# Altium PCB golden_arduino.PcbDoc
Units mil, origin at the board's own origin, x right, y up, seen from the top; angles counter-clockwise.
Board outline 3256 x 3059 mil, 2 copper layers (Top Layer, Bottom Layer); 59 components, 54 nets, 247 pads, 46 vias.
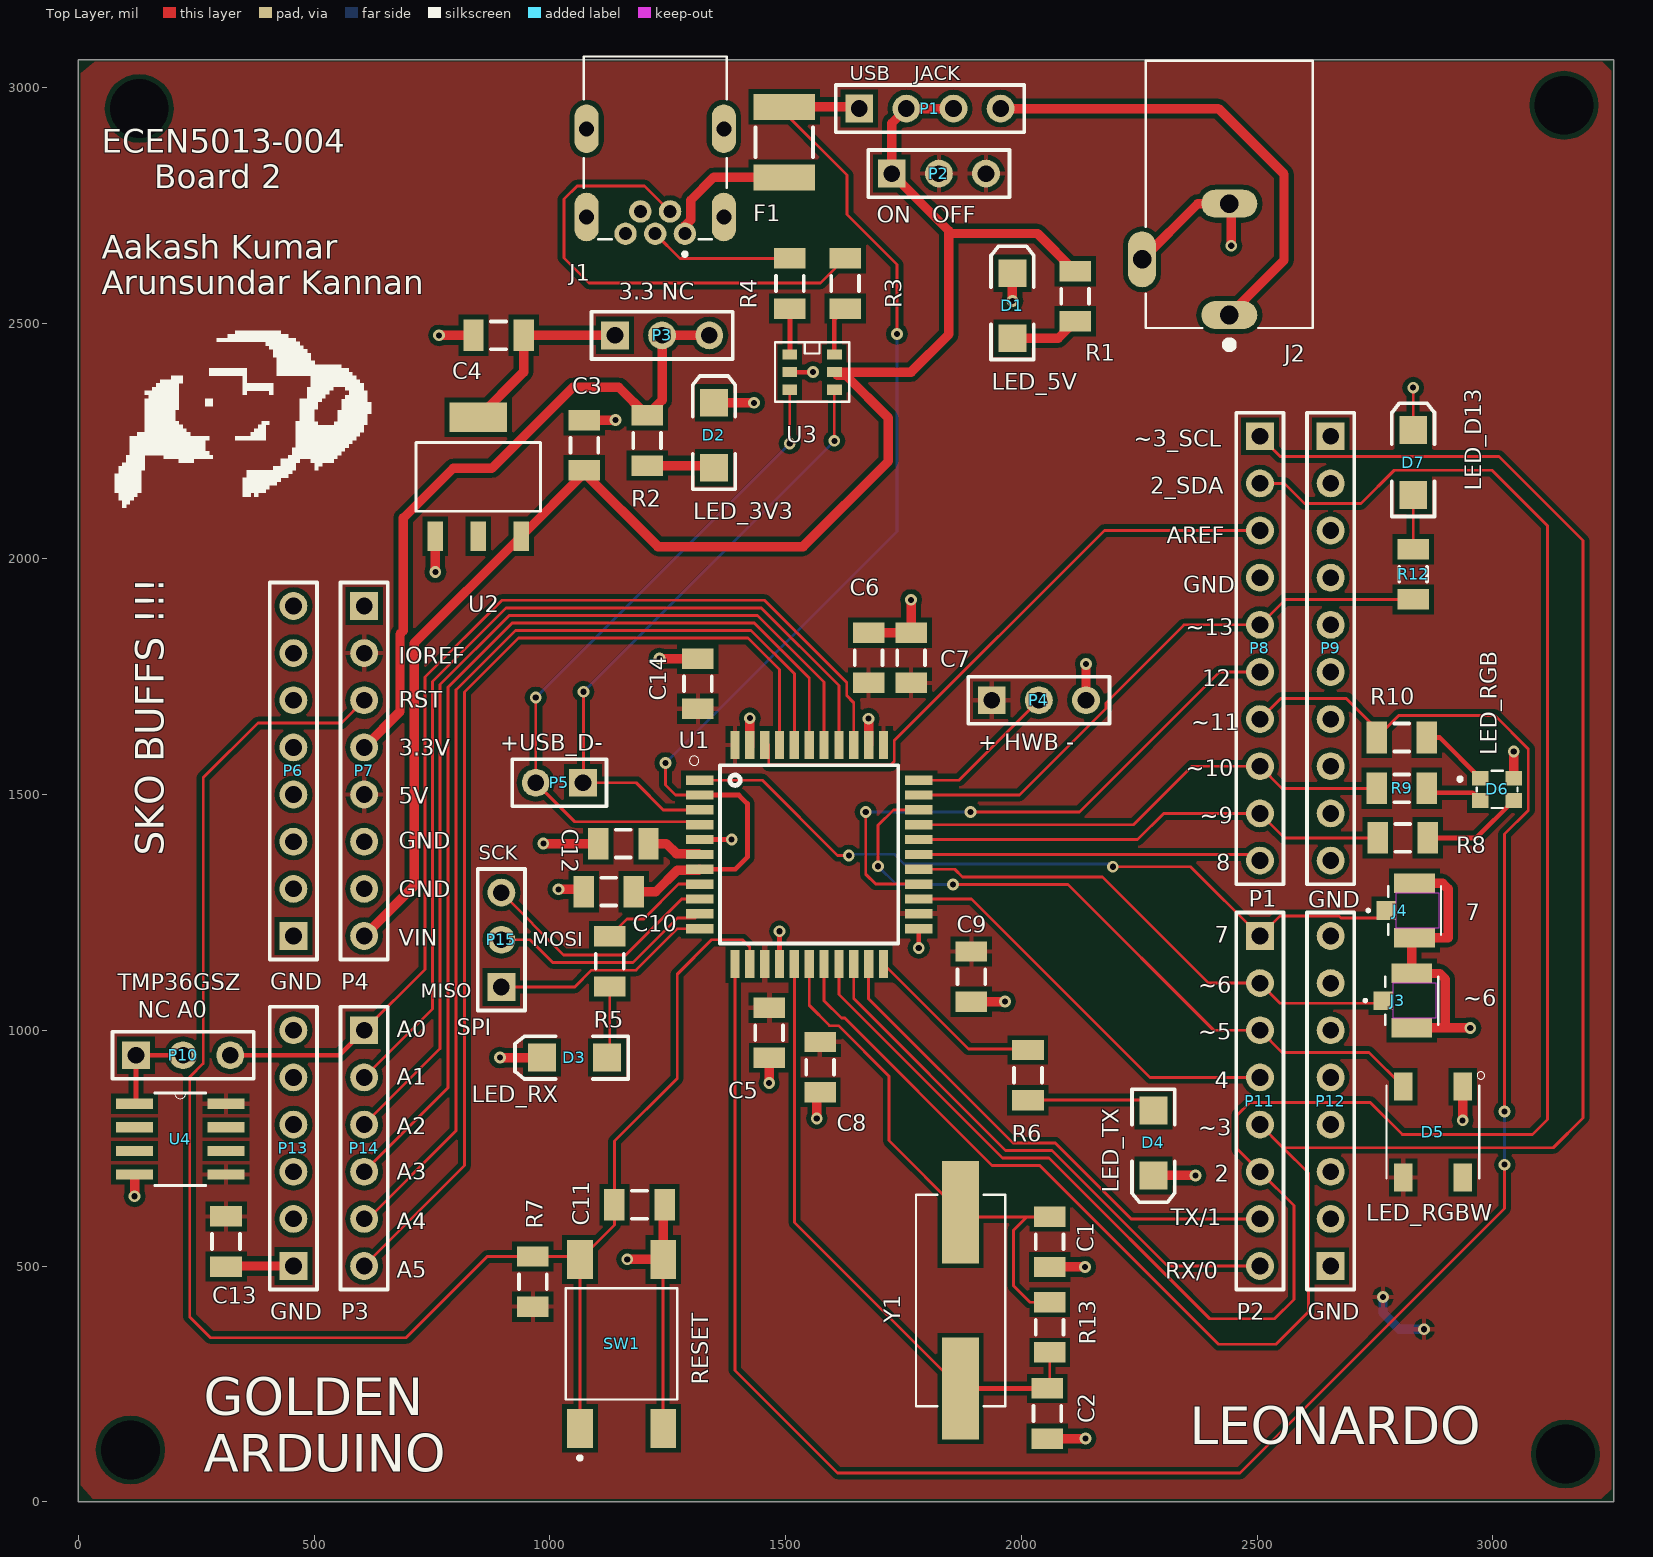
[diagram p0: Top Layer view]
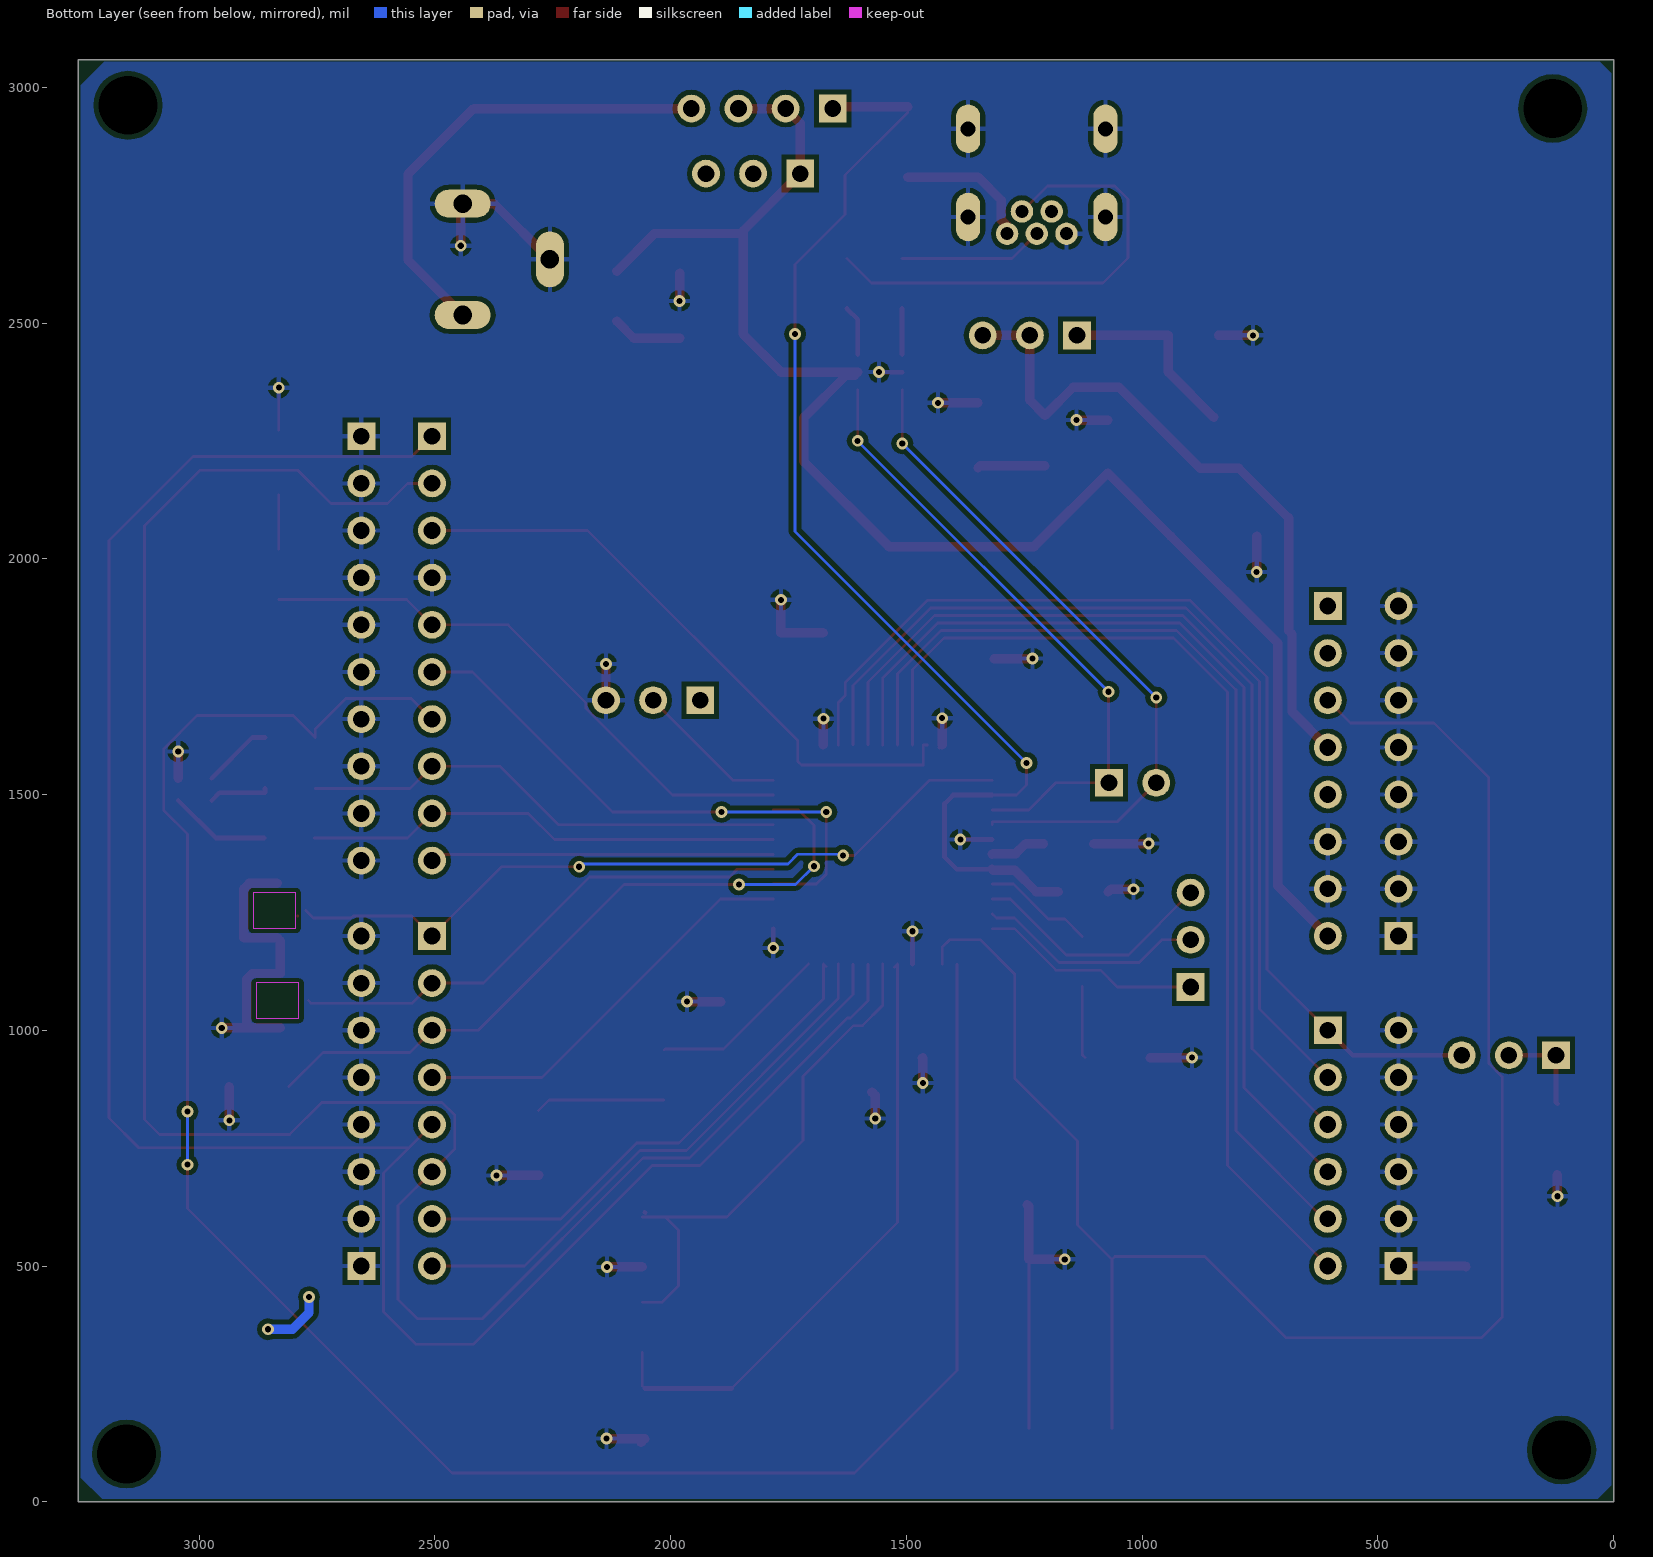
[diagram p1: Bottom Layer view, seen from below]

## Layer stack, top to bottom
Top Solder: solder mask 0.4, Solder Resist, Dk 3.5
Top Layer: signal copper 1.4
Dielectric 1: dielectric 12.6, FR-4, Dk 4.8
Bottom Layer: signal copper 1.4
Bottom Solder: solder mask 0.4, Solder Resist, Dk 3.5

## Board outline
0,0 3256,0 3256,3059 0,3059

## Design rules (kind name [scope] priority, off if disabled: settings)
Clearance [All] p1: gap=10 ignorepadtopadclearanceinfootprint=TRUE except(0: Arc-Hole Track-Hole SMDPad-Hole THPad-Hole Via-Hole Fill-Hole Poly-Hole Region-Hole Text-Hole)
PolygonConnect [All] p1: connectstyle=Relief reliefconductorwidth=10 reliefentries=4 polygonreliefangle="90 Angle" airgapwidth=10
RoutingVias [All] p1: holewidth=13 width=25 viastyle="Through Hole" minholewidth=13 minwidth=25 maxholewidth=13 maxwidth=25
SolderMaskExpansion [All] p1: expansion=4
Width [All] p1: maxlimit=20 minlimit=6 preferedwidth=10
30 further rules are at their usual default settings.

## Components (designator, comment, footprint, x,y, rotation, side; value= is the part's Value field where it differs from the comment)
C1 "Cap Semi" C1206 2060,551.15 r90 top value=22pF
C2 "Cap Semi" C1206 2055,187.15 r90 top value=22pF
C3 "Cap Semi" C1206 1073,2241 r270 top value=22uF
C4 "Cap Semi" C1206 891,2474 r0 top value=22uF
C5 "Cap Semi" C1206 1465,994.85 r90 top value=22uF
C6 "Cap Semi" C1206 1676,1790 r270 top value=22uF
C7 "Cap Semi" C1206 1766,1790 r270 top value=22uF
C8 "Cap Semi" C1206 1573,922 r90 top value=22uF
C9 "Cap Semi" C1206 1894,1114 r90 top value=22uF
C10 "Cap Semi" C1206 1125,1294 r0 top value=22uF
C11 "Cap Semi" C1206 1190,630 r180 top value=22uF
C12 "Cap Semi" C1206 1156,1396 r0 top value=1uF
C13 "Cap Semi" C1206 313,552 r90 top value=22uF
C14 "Cap Semi" C1206 1314,1735.15 r270 top value=22uF
D1 "LED_5V" 3.2X1.6X1.1 1981,2536.9 r90 top
D2 "LED_3V3" 3.2X1.6X1.1 1348,2262 r90 top
D3 "LED_RX" 3.2X1.6X1.1 1052,942 r180 top
D4 "LED_TX" 3.2X1.6X1.1 2280,761 r270 top
D5 "LED_RGBW" *LED_IN-PI554FCH 2873,784 r270 top
D6 "LED_RGB" *LED_ASMB-KTF0-0A306 3009,1511 r0 top
D7 "LED_D13" 3.2X1.6X1.1 2831,2204 r90 top
F1 "Fuse Thermal" 1812 1497,2884 r90 top
J1 "XM7D-0512" *OMRON_XM7D-0512_XM7D-0512(Primary) 1223.33,2724.99 r0 top
J2 "PJ-102A" *CUI_PJ-102A 2441,2773 r90 top
J3 "~6" *TE_HRS_U.FL-R-SMT(10) 2828,1063 r0 top
J4 "7" *TE_HRS_U.FL-R-SMT(10) 2834,1254.07 r0 top
P1 "USB    JACK" HDR1X4 1656,2955 r0 top
P2 "ON   OFF" HDR1X3 1725,2817 r0 top
P3 "3.3 NC" HDR1X3 1138,2474 r0 top
P4 "+ HWB -" HDR1X3 1937,1700 r0 top
P5 "+USB_D-" HDR1X2 1070,1525 r180 top
P6 "GND" HDR1X8 456,1200 r90 top
P7 "P4" HDR1X8 606,1900 r270 top
P8 "P1" HDR1X10 2506,2260 r270 top
P9 "GND" HDR1X10 2656,2260 r270 top
P10 "NC A0" HDR1X3 122,947 r0 top
P11 "P2" HDR1X8 2506,1200 r270 top
P12 "GND" HDR1X8 2656,500 r90 top
P13 "GND" HDR1X6 456,500 r90 top
P14 "P3" HDR1X6 606,1000 r270 top
P15 "SPI" HDR1X3 897,1092 r90 top
R1 "Res3" C1206 2114,2557 r90 top value=1K
R2 "Res3" C1206 1206,2251 r90 top value=1K
R3 "Res3" C1206 1626,2584 r90 top value=22
R4 "Res3" C1206 1509,2584 r90 top value=22
R5 "Res3" C1206 1127,1146 r90 top value=1K
R6 "Res3" C1206 2014,905 r90 top value=1K
R7 "Res3" C1206 964,467 r270 top value=1k
R8 "Res3" C1206 2809,1408 r180 top value=300
R9 "Res3" C1206 2807,1513 r180 top value=300
R10 "Res3" C1206 2807,1621 r180 top value=300
R12 "Res3" C1206 2831,1967 r270 top value=300
R13 "Res3" C1206 2060,369.85 r270 top value=1M
SW1 "RESET" *TE_FSM4JSMA 1152,335 r90 top
U1 "ATMEGA32U4RC-AU" *QFP80P1200X1200X120-44N 1550,1373 r0 top
U2 "AZ1117CH-3.3TRG1" *SOT230P696X180-4N 848,2174 r90 top
U3 "IP4234CZ6,125" *SOT-457 1556,2396 r0 top
U4 "TMP36GSZ" *SOIC127P600X175-8N 216,769 r0 top
Y1 "ECS-35-17-5PX-TR" *XTAL_ECS-35-17-5PX-TR 1871,427 r90 top

## Footprints (in the part's own frame and the unit in brackets; to place one, negate y for a bottom-side part, rotate by r counter-clockwise, add the part's x,y. Pads: shape width x height; smd on the part's side, far side on the other; paste and mask are expansions set on the pad)
3.2X1.6X1.1 [mm] "SMT LED; 2 Flat Leads"
  rect 1.5x1.5 smd: 1(-1.75,0) 2(1.75,0)
  silkscreen extent -2.9,-1.15 3.2,1.15
1812 [mm] "Chip Capacitor, Body 4.5x3.2mm, IPC High Density"
  rect 1.4x3.3 smd: 1(-1.9,0) 2(1.9,0)
  silkscreen extent -0.8,-1.55 0.8,1.55, body extent -2.4,-1.7 2.4,1.7, height 1.4
*CUI_PJ-102A [mm]
  oval 1.508x3.016 hole 1: 1(-6.5,0) 2(-0.5,0)
  oval 3.016x1.508 hole 1: 3(-3.5,4.7)
  silkscreen extent -8.3,-4.5 7.2,4.5
*LED_ASMB-KTF0-0A306 [mm]
  rect 0.9x0.8 smd: 1(0.9,-0.6) 2(-0.9,-0.6) 3(-0.9,0.6) 4(0.9,0.6)
  silkscreen extent -2.1,-1 1.1,1
*LED_IN-PI554FCH [mm]
  rect 1.5x1 smd: 1(-2.45,1.6) 2(-2.45,-1.6) 3(2.45,-1.6) 4(2.45,1.6)
  silkscreen extent -3.25,-2.5 2.5,2.78
*OMRON_XM7D-0512_XM7D-0512(Primary) [mm]
  round 1.208 hole 0.7: 1(1.6,-0.9) 2(0.8,0.3) 3(0,-0.9) 4(-0.8,0.3) 5(-1.6,-0.9)
  oval 1.308x2.616 hole 0.8: SH1(-3.7,4.75) SH2(-3.7,0) SH3(3.7,0) SH4(3.7,4.75)
  silkscreen extent -3.85,-2.1 3.85,8.65
*QFP80P1200X1200X120-44N [mm]
  rect 1.5x0.5 smd: 1(-5.9,4) 2(-5.9,3.2) 3(-5.9,2.4) 4(-5.9,1.6) 5(-5.9,0.8) 6(-5.9,0) 7(-5.9,-0.8) 8(-5.9,-1.6) 9(-5.9,-2.4) 10(-5.9,-3.2) 11(-5.9,-4) 23(5.9,-4) 24(5.9,-3.2) 25(5.9,-2.4) 26(5.9,-1.6) 27(5.9,-0.8) 28(5.9,0) 29(5.9,0.8) 30(5.9,1.6) 31(5.9,2.4) 32(5.9,3.2) 33(5.9,4)
  rect 0.5x1.5 smd: 12(-4,-5.9) 13(-3.2,-5.9) 14(-2.4,-5.9) 15(-1.6,-5.9) 16(-0.8,-5.9) 17(0,-5.9) 18(0.8,-5.9) 19(1.6,-5.9) 20(2.4,-5.9) 21(3.2,-5.9) 22(4,-5.9) 34(4,5.9) 35(3.2,5.9) 36(2.4,5.9) 37(1.6,5.9) 38(0.8,5.9) 39(0,5.9) 40(-0.8,5.9) 41(-1.6,5.9) 42(-2.4,5.9) 43(-3.2,5.9) 44(-4,5.9)
  silkscreen extent -6.45,-4.8 4.8,5.3
*SOIC127P600X175-8N [mil]
  rect 78x22 smd: 1(-97,75) 2(-97,25) 3(-97,-25) 4(-97,-75) 5(97,-75) 6(97,-25) 7(97,25) 8(97,75)
  silkscreen extent -54,-98 54,98
*SOT230P696X180-4N [mil]
  rect 63x33 smd: 1(-126,91) 2(-126,0) 3(-126,-91)
  rect 63x122 smd: 4(126,0)
  silkscreen extent -73,-132 73,132
*SOT-457 [mm]
  rect 0.8x0.55 smd: 1(-1.2,0.95) 2(-1.2,0) 3(-1.2,-0.95) 4(1.2,-0.95) 5(1.2,0) 6(1.2,0.95)
  silkscreen extent -2,-1.6 2,1.6
*TE_FSM4JSMA [mm]
  rect 2.1x1.38 smd: 1(-4.55,2.24) 2(4.55,2.24) 3(-4.55,-2.24) 4(4.55,-2.24)
  silkscreen extent -6.25,-3 3,3
*TE_HRS_U.FL-R-SMT(10) [mm]
  rect 1.05x1 smd: 1(-1.525,0)
  rect 2.2x1.05 smd: 2(0,1.475) 3(0,-1.475)
  Keep-Out Layer region: -1,0.95 1.3,0.95 1.3,-0.95 -1,-0.95
  Keep-Out Layer region: -1,0.95 1.3,0.95 1.3,-0.95 -1,-0.95
  Keep-Out Layer region: -1,0.95 1.3,0.95 1.3,-0.95 -1,-0.95
  Keep-Out Layer region: -1,0.95 1.3,0.95 1.3,-0.95 -1,-0.95
  Keep-Out Layer region: -1,0.95 1.3,0.95 1.3,-0.95 -1,-0.95
  Keep-Out Layer region: -1,0.95 1.3,0.95 1.3,-0.95 -1,-0.95
  silkscreen extent -2.57,-1.3 1.42,1.3
*XTAL_ECS-35-17-5PX-TR [mm]
  rect 5.5x2 smd: 1(-4.75,0) 2(4.75,0)
  silkscreen extent -5.7,-2.4 5.7,2.4
C1206 [mm] "Chip Capacitor, Body 3.2x1.6mm, IPC High Density"
  rect 1.1x1.7 smd: 1(-1.35,0) 2(1.35,0)
  silkscreen extent -0.4,-0.75 0.4,0.75, body extent -1.7,-0.9 1.7,0.9, height 1.3
HDR1X2 [mm] "Connector; Header; 2 Position"
  rect 1.5x1.5 hole 0.9: 1(0,0)
  round 1.5 hole 0.9: 2(2.54,0)
  silkscreen extent -1.27,-1.27 3.81,1.27
HDR1X3 [mm] "Connector; Header; 3 Position"
  rect 1.5x1.5 hole 0.9: 1(0,0)
  round 1.5 hole 0.9: 2(2.54,0) 3(5.08,0)
  silkscreen extent -1.27,-1.27 6.35,1.27
HDR1X4 [mm] "Connector; Header; 4 Position"
  rect 1.5x1.5 hole 0.9: 1(0,0)
  round 1.5 hole 0.9: 2(2.54,0) 3(5.08,0) 4(7.62,0)
  silkscreen extent -1.27,-1.27 8.89,1.27
HDR1X6 [mm] "Connector; Header; 6 Position"
  rect 1.5x1.5 hole 0.9: 1(0,0)
  round 1.5 hole 0.9: 2(2.54,0) 3(5.08,0) 4(7.62,0) 5(10.16,0) 6(12.7,0)
  silkscreen extent -1.27,-1.27 13.97,1.27
HDR1X8 [mm] "Connector; Header; 8 Position"
  rect 1.5x1.5 hole 0.9: 1(0,0)
  round 1.5 hole 0.9: 2(2.54,0) 3(5.08,0) 4(7.62,0) 5(10.16,0) 6(12.7,0) 7(15.24,0) 8(17.78,0)
  silkscreen extent -1.27,-1.27 19.05,1.27
HDR1X10 [mm] "Connector; Header; 10 Position"
  rect 1.5x1.5 hole 0.9: 1(0,0)
  round 1.5 hole 0.9: 2(2.54,0) 3(5.08,0) 4(7.62,0) 5(10.16,0) 6(12.7,0) 7(15.24,0) 8(17.78,0) 9(20.32,0) 10(22.86,0)
  silkscreen extent -1.27,-1.27 24.13,1.27

## Part data
C1 C2: "Capacitor (Semiconductor SIM Model)", DigiKeyPartNo=732-7867-1-ND, LatestRevisionDate=29-May-2009, LatestRevisionNote="IPC-7351 Footprint Added.", PackageDescription="Chip Capacitor", PackageReference=C1206, Published=8-Jun-2000, Publisher="Altium Limited"
C3 C4 C5 C6 C7 C8 C9 C10 C13 C14: "Capacitor (Semiconductor SIM Model)", DigiKeyPartNo=1276-3300-1-ND, LatestRevisionDate=29-May-2009, LatestRevisionNote="IPC-7351 Footprint Added.", PackageDescription="Chip Capacitor", PackageReference=C1206, Published=8-Jun-2000, Publisher="Altium Limited"
C11 C12: "Capacitor (Semiconductor SIM Model)", LatestRevisionDate=29-May-2009, LatestRevisionNote="IPC-7351 Footprint Added.", PackageDescription="Chip Capacitor", PackageReference=C1206, Published=8-Jun-2000, Publisher="Altium Limited"
D1 D2 D3 D4 D7: library part LED2, "Typical RED, GREEN, YELLOW, AMBER GaAs LED", LatestRevisionDate=17-Jul-2002, LatestRevisionNote="Re-released for DXP Platform.", PackageDescription="SM LED; 2 Flat Leads", PackageReference=3.2X1.6X1.1, PackageVersion=Feb-2002, Published=8-Jun-2000, Publisher="Altium Limited"
D5: library part IN-PI554FCH, "5050RGB with integrated IC built in 4 PIN Viewing angle: 120 degrees", DigiKeyPartNo=1830-1209-1-ND, Package="SMD-4 Innolux", Availability=Unavailable, MF=Inolux, MP=IN-PI554FCH, Price=None, SnapEDA_Link=https://www.snapeda.com/parts/IN-PI554FCH/Inolux/view-part/?ref=snap
D6: library part ASMB-KTF0-0A306, "2220 Tricolor PLCC4 Surface Mount LED", DigiKeyPartNo=1497-1225-1-ND, Package="PLCC-4 Broadcom", Availability=Unavailable, MF=SunLED, MP=XZM2CRKM2DGFBB45SCCB, Price=None, SnapEDA_Link=https://www.snapeda.com/parts/ASMB-KTF0-0A306/Broadcom%20Limited/view-part/?ref=snap
F1: "Thermal Fuse", DigiKeyPartNo=MF-MSMF050-2CT-ND, ManufacturerPartNo=MF-MSMF050-2, LatestRevisionDate=17-Jul-2002, LatestRevisionNote="Re-released for DXP Platform.", PackageDescription="Thru-Hole; 2 Leads", PackageReference=1812, Published=24-Mar-1999, Publisher="Altium Limited"
J1: "Conn Mini USB Type B SKT 5 POS 0.8mm Solder RA Thru-Hole 5 Terminal 1 Port", Package=None, Availability=Unavailable, ComponentLink1URL=https://www.digikey.com/product-detail/en/omron-electronics-inc-emc-div/XM7D-0512/OR1205-ND/4695531, MF="Omron Electronics", MP=XM7D-0512, Price=None, SnapEDA_Link=https://www.snapeda.com/parts/XM7D-0512/Omron%20Electronics%20Inc-EMC%20Div/view-part/?ref=snap
J2: "2.0 mm Center Pin, 2.5 A, Right Angle, Through Hole, Tapered Pins, Dc Power Jack Connector", Package=None, Availability=Unavailable, CUI_purchase_URL=https://www.cui.com/product/interconnect/dc-power-connectors/jacks/2.0-mm-center-pin/pj-102a?utm_source=snapeda.com&utm_medium=referral&utm_campaign=snapedaBOM, MF="CUI Inc.", MP=PJ-102A, Price=None, SnapEDA_Link=https://www.snapeda.com/parts/PJ-102A/CUI%20Inc./view-part/?ref=snap
J3 J4: library part U.FL-R-SMT(10), "U.FL Series 50 Ohm Receptacle Male Pins Ultra Small SMT Coaxial Connector", Package="FakePackage u", Availability=Unavailable, MF=Hirose, MP=U.FL-R-SMT_10_, Price=None, SnapEDA_Link=https://www.snapeda.com/parts/U.FL-R-SMT%2810%29/Hirose%20Electric%20Co%20Ltd/view-part/?ref=snap
P1: library part "Header 4", "Header, 4-Pin", LatestRevisionDate=17-Jul-2002, LatestRevisionNote="Re-released for DXP Platform.", Publisher="Altium Limited"
P2 P3 P4 P10 P15: library part "Header 3", "Header, 3-Pin", LatestRevisionDate=17-Jul-2002, LatestRevisionNote="Re-released for DXP Platform.", Publisher="Altium Limited"
P5: library part "Header 2", "Header, 2-Pin", LatestRevisionDate=17-Jul-2002, LatestRevisionNote="Re-released for DXP Platform.", Publisher="Altium Limited"
P6 P7 P11 P12: library part "Header 8", "Header, 8-Pin", LatestRevisionDate=17-Jul-2002, LatestRevisionNote="Re-released for DXP Platform.", Publisher="Altium Limited"
P8 P9: library part "Header 10", "Header, 10-Pin", LatestRevisionDate=17-Jul-2002, LatestRevisionNote="Re-released for DXP Platform.", Publisher="Altium Limited"
P13 P14: library part "Header 6", "Header, 6-Pin", LatestRevisionDate=17-Jul-2002, LatestRevisionNote="Re-released for DXP Platform.", Publisher="Altium Limited"
R1 R2 R3 R4 R5 R6 R7 R8 R9 R10 R12 R13: "Resistor", LatestRevisionDate=29-May-2009, LatestRevisionNote="IPC-7351 Footprint Added.", PackageDescription="Chip Resistor", Published=8-Jun-2000, Publisher="Altium Limited"
  R1 R2 R3 R4 R5 R6 R8 R9 R10 R12: PackageReference=J1-0603
  R7 R13: PackageReference=1206
SW1: library part FSM4JSMA, "FSM4JSMA=SMT,TACTILE,PB SWITCH", Package=None, Availability=Unavailable, EU_RoHS_Compliance=Compliant, MF="TE Connectivity", MP=FSM4JSMA, Price=None, SnapEDA_Link=https://www.snapeda.com/parts/FSM4JSMA/TE%20Connectivity%20ALCOSWITCH%20Switches/view-part/?ref=snap, TE_purchase_URL=https://www.te.com/usa-en/product-4-1437565-1.html?te_bu=Cor&te_type=disp&te_campaign=seda_glo_cor-seda-global-disp-prtnr-fy19-seda-model-bom-cta_sma-317_1&elqCampaignId=32493
U1: library part ATMEGA32U4-AU, "MCU 8-bit ATmega AVR RISC 32KB Flash 3.3V/5V 44-Pin TQFP", Package="TQFP-44 Microchip", Availability=Unavailable, ComponentLink1Description=Documentation, ComponentLink1URL=https://www.digikey.com/products/en?keywords=ATMEGA32U4RC-AU-ND, MF=Microchip, MP=ATMEGA32U4-AU, Price=None, SnapEDA_Link=https://www.snapeda.com/parts/ATMEGA32U4-AU/Microchip/view-part/?ref=snap
U2: library part LM1117MP-3.3, "Voltage stabiliser; LDO, fixed; 3.3V; 0.8A; SOT223; SMD", DigiKeyPartNo=AZ1117CH-3.3TRG1DICT-ND, Package="SOT-223 Texas Instruments", Availability=Unavailable, MF="Diodes Incorporated", MP=AZ1117CH-3.3TRG1, Price=None, SnapEDA_Link=https://www.snapeda.com/parts/LM1117MP-3.3/NOPB/Texas%20Instruments/view-part/?ref=snap
U3: library part IP4234CZ6, "DIODE, ESD TVS, USB2.0, SOT457; Operating Voltage: 3V; No. of Pins: 6; SVHC: No SVHC _18-Jun-2010_", Package="SO-6 NXP Semiconductors", Availability=Unavailable, MF="NXP Semiconductors", MP=IP4234CZ6,125, Price=None, SnapEDA_Link=https://www.snapeda.com/parts/IP4234CZ6/NXP%20Semiconductors/view-part/?ref=snap
U4: "Temp Sensor Analog_Voltage_ Serial _2-Wire_ 8-Pin SOIC N Tube", Package="SOIC-8 Analog Devices", Availability=Unavailable, MF="Analog Devices", MP=TMP36GSZ, Price=None, SnapEDA_Link=https://www.snapeda.com/parts/TMP36GSZ/Analog%20Devices%20Inc./view-part/?ref=snap
Y1: "Crystal 3.579545MHz ±30ppm _Tol_ ±50ppm _Stability_ 17pF FUND 150Ohm 2-Pin HC-49/USX SMD T/R", Package="HC49/US ECS International", Availability=Unavailable, MF="ECS Inc.", MP=ECS-35-17-5PX-TR, Price=None, SnapEDA_Link=https://www.snapeda.com/parts/ECS-35-17-5PX-TR/ECS%20Inc./view-part/?ref=snap

## Free pads (board coordinates)
  round 60 hole 125: 2(3151,2962) 3(129,2955) 4(110,110) 5(3154,101)

## Via types
v1: diameter 25, hole 13, Top Layer to Bottom Layer, tented both sides, 46 vias

## Nets (pads, with @x,y where several pads share a name; then routed paths per layer and width w, separated by ;. In a path a pad name is that pad's centre, name@x,y a point inside that pad or via, vN(x,y) a via of type N, cw(c..) or ccw(c..) an arc to the next point about the centre after c; other vN are vias at no path point)
3V3_VCC: P3.2 P3.3 P7.4 R2.2 | length 1461
  Top Layer w20: P7.4 682,1676 682,1840.43 689,1847.43 689,2087 690,2087 795,2192 877,2192 1049,2364 1146.15,2364 R2.2 1238,2336.15 P3.2 P3.3
A0: P10.3 P14.1 U1.36 | length 2281.1
  Top Layer w6: P14.1 735,1129 735,1749 898,1912 1455,1912 1629.54,1737.46 1629.54,1709.81 1644.49,1694.86 U1.36
  Top Layer w10: P10.3 553,947 P14.1
A1: P14.2 U1.37 | length 2021
  Top Layer w6: P14.2 751,1045 751,1740 907,1896 1448.37,1896 1612.99,1731.38 U1.37
A2: P14.3 U1.38 | length 2089.1
  Top Layer w6: P14.3 767,961 767,1733.37 913.63,1880 1440,1880 1581.5,1738.5 U1.38
  Top Layer w10: P14.3 P14.3@606,822
A3: P14.4 U1.39 | length 2114.3
  Top Layer w6: P14.4 784,878 784,1727.75 920.25,1864 1433.37,1864 1550,1747.37 U1.39
A4: P14.5 U1.40 | length 2166.2
  Top Layer w6: P14.5 614,600 801,787 801,1722.12 926.88,1848 1426.75,1848 1518.5,1756.24 U1.40
A5: P14.6 U1.41 | length 2208.7
  Top Layer w6: P14.6 819,713 819,1717.49 933.51,1832 1420.12,1832 1487.01,1765.11 U1.41
AREF: P8.3 U1.42 | length 1324.7
  Top Layer w6: U1.42 1464.17,1605.28 1464.17,1562.76 1722.71,1562.76 1730.32,1570.37 1730.32,1614.32 2176,2060 P8.3
D0_RX: P11.8 U1.20 | length 1170
  Top Layer w6: U1.20 1644.49,1067.14 1966.63,745 2065.25,745 2310.25,500 P11.8
D1_TX: P11.7 U1.21 | length 1104.9
  Top Layer w6: U1.21@1670.54,1135.27 U1.21 1675.98,1067.02 1982,761 2071.88,761 2232.88,600 P11.7
D2_SDA: P8.2 P11.6 U1.19 | length 4447.7
  Top Layer w6: U1.19 1612.99,1076.01 1960,729 2058.63,729 2399.63,388 2537,388 2578,429 2578,628 P11.6 2458,748 2458,820 2485,847 2740,847 2808,779 3084,779 3116,811 3116,2070 2998,2188 2791,2188 2720.47,2117.47 2600.53,2117.47 2558,2160 P8.2
D3_SCL: P8.1 P11.5 U1.18 | length 4539.4
  Top Layer w6: U1.18 1581.5,1062.5 1618.2,1025.8 1625.23,1025.8 1938.03,713 2039,713 2418,334 2540,334 2609,403 2609,697 2555,751 ; P11.5 2555,751 ; P8.1 2549,2217 3013,2217 3191,2039 3191,814 3128,751 2555,751
D4: P11.4 U1.25 | length 880.5
  Top Layer w6: U1.25 1894.49,1278.51 2273,900 P11.4
D5-: D5.2 P11.3 U1.31 | length 1494.4
  Top Layer w6: v1(1696,1348) 1696,1435 1728.49,1467.49 U1.31 ; v1(1855,1309) 2099,1309 2408,1000 P11.3 2553,953 2737.46,953 D5.2
  Bottom Layer w6: v1(1696,1348) 1735,1309 v1(1855,1309)
D6-: J3.1 P11.2 U1.27 | length 1105.6
  Top Layer w6: U1.27 1858.56,1341.5 1875.06,1325 2172,1325 2397,1100 P11.2 2548.53,1057.47 2762.43,1057.47 J3.1
D7: J4.1 P11.1 U1.1 | length 1625.5
  Top Layer w6: U1.1 1450.52,1530.48 1610,1371 v1(1634,1371) ; v1(2194,1347) 2359,1347 P11.1 2548.53,1242.53 2673.62,1242.53 2678.14,1238 2757.89,1238 J4.1 ; J4.1@2790.96,1241.93 J4.1@2790.96,1242.53
  Bottom Layer w6: v1(1634,1371) 1636.5,1373.5 1730.5,1373.5 1751,1353 2194,1353 v1(2194,1347)
D+: P5.2 U1.4 U3.3 | length 1445.1
  Top Layer w6: v1(970,1706) P5.2 1052.54,1442.46 1317.72,1442.46 U1.4 ; v1(1508.76,2244.76) U3.3
  Bottom Layer w6: v1(970,1706) v1(1508.76,2244.76)
D-: P5.1 U1.3 U3.4 | length 1326
  Top Layer w6: v1(1071,1718) 1071,1526 P5.1 1183,1525 1240.51,1467.49 U1.3 ; v1(1603.24,2250.24) U3.4
  Bottom Layer w6: v1(1071,1718) v1(1603.24,2250.24)
DMINUS: J1.2 R3.2 | length 1023.4
  Top Layer w6: J1.2 1200.63,2791 1058,2791 1030,2763 1030,2638 1083,2585 1573.85,2585 R3.2
DPLUS: J1.3 R4.2 | length 307.4
  Top Layer w6: J1.3 1275.74,2637.15 R4.2
GND: C1.1 C2.1 C3.1 C4.1 C5.1 C6.1 C7.1 C8.1 C9.1 C10.1 C11.1 C12.1 C13.1 C14.1 D1.2 D2.2 D3.2 D4.2 D5.1 D6.4 D7.2 J1.5 J1.SH1 J1.SH2 J1.SH3 J1.SH4 J2.2 J2.3 J3.2 J3.3 J4.2 J4.3 P4.3 P6.1 P6.2 P6.3 P6.4 P6.5 P6.6 P6.7 P6.8 P7.6 P7.7 P8.4 P9.1 P9.2 P9.3 P9.4 P9.5 P9.6 P9.7 P9.8 P9.9 P9.10 P12.1 P12.2 P12.3 P12.4 P12.5 P12.6 P12.7 P12.8 P13.1 P13.2 P13.3 P13.4 P13.5 P13.6 SW1.3 SW1.4 U1.5 U1.15 U1.23 U1.35 U1.43 U2.1 U3.2 U4.4 | length 3741.3
  Top Layer w6: SW1.3 SW1.4 ; D7.2 v1(2831,2363)
  Top Layer w10: U1.5 v1(1385.5,1404.5) ; U1.43 U1.43@1429,1600.3 ; U1.15 v1(1487.01,1209.99) ; U3.2 v1(1558,2396) ; v1(1782.28,1174.72) U1.23 ; P12.7 P12.7@2673.01,1082.99
  Top Layer w20: v1(119,648) U4.4 ; C13.1 314.15,500 P13.1 ; v1(757,1972) U2.1 ; v1(765,2474) C4.1 ; v1(894,942) D3.2 ; v1(986,1396) C12.1 ; v1(1018,1299) 1066.85,1299 C10.1 ; C3.1 v1(1139.15,2294.15) ; v1(1164.13,514.13) SW1.4 1240.19,627.04 C11.1 ; v1(1232.3,1788.3) C14.1 ; D2.2 v1(1432.9,2330.9) ; U1.43 v1(1424.02,1661.98) ; v1(1465,888) C5.1 C5.1@1465.85,940.85 ; v1(1566,813) 1566,861.85 C8.1 ; U1.35 v1(1675.98,1660.98) ; C6.1 C7.1 v1(1766,1913) ; C9.1 v1(1965.15,1060.85) ; v1(1981,2547) D1.2 ; C1.1 v1(2135,498) ; C2.1@2063,126 C2.1 v1(2136,134) ; P4.3@2136,1699 P4.3 v1(2137,1777) ; J2.3 2374.07,2753.32 J2.2 2445,2749.32 v1(2445,2664) ; D4.2 v1(2369.1,692.1) ; J4.2 2834,1311.47 2893.47,1311.47 2905.18,1299.76 2905.18,1196.67 2834,1196.67 J4.3 2828,1190 J3.2 2828,1120.4 2887.47,1120.4 2899.18,1108.69 2899.18,1005.6 2828,1005.6 J3.3 v1(2951.93,1004.93) ; v1(2935.99,809.01) D5.1 ; D6.4 v1(3044.43,1591.57)
IO8: P8.10 U1.28 | length 729.1
  Top Layer w6: U1.28 2493,1373 P8.10
IO9-: P8.9 R8.2 U1.29 | length 1018.1
  Top Layer w6: U1.29 2246.5,1404.5 2302,1460 P8.9 2558,1408 R8.2
IO10-: P8.8 R9.2 U1.30 | length 1042.4
  Top Layer w6: U1.30 2237.99,1435.99 2362,1560 P8.8 2553,1513 R9.2
IO11-: P8.7 R10.2 U1.12 | length 4493.7
  Top Layer w6: U1.12 1392.52,278.48 1610,61 2464,61 3025,622 v1(3025,715) ; P8.7 2550,1704 2689,1704 2753.85,1639.15 R10.2 2800.31,1667.46 3004.6,1667.46 3075.15,1596.91 3075.15,1466.25 3025,1416.09 v1(3025,828)
  Bottom Layer w6: v1(3025,715) v1(3025,828)
IO12: P8.6 U1.26 | length 1212
  Top Layer w6: v1(1670.02,1462.98) 1670.02,1331 1691.01,1310.01 U1.26 ; v1(1891.98,1462.98) 2122.98,1462.98 2420,1760 P8.6
  Bottom Layer w6: v1(1670.02,1462.98) v1(1891.98,1462.98)
IO13-: P8.5 R12.2 U1.32 | length 1227.7
  Top Layer w6: U1.32 1996.13,1498.98 2179.53,1682.38 2179.53,1694.53 2345,1860 P8.5 2559.85,1913.85 R12.2
MISO: P15.1 U1.11 | length 471.9
  Top Layer w6: P15.1 1052.65,1092 1088.15,1127.5 1182.5,1127.5 1270.52,1215.52 U1.11
MOSI: P15.2 U1.10 | length 484.7
  Top Layer w6: P15.2 958,1192 1006,1144 1082.02,1144 1081.52,1143.5 1175.88,1143.5 1270.74,1238.36 1309.06,1238.36 U1.10
NetC2_2: C2.2 R13.2 U1.16 Y1.1 | length 1317.8
  Top Layer w6: U1.16@1525.46,1133.76 U1.16 1518.5,592.49 Y1.1 ; C2.2@2055.7,241 2060,245.3 R13.2
  Top Layer w10: Y1.1 C2.2@2054.71,239.99
NetC4_2: C4.2 P3.1 U2.4 | length 407.7
  Top Layer w20: U2.4 944.15,2396.15 C4.2 P3.1
NetC12_2: C12.2 U1.6 | length 118.1
  Top Layer w20: C12.2 1246.84,1396 1268.19,1374.65 1316.06,1374.65 U1.6
NetD1_1: D1.1 R1.1 | length 147.8
  Top Layer w20: D1.1 2078.15,2468 R1.1
NetD2_1: D2.1 R2.1 | length 144
  Top Layer w20: R2.1 1343.25,2197.85 D2.1
NetD3_1: D3.1 R5.1 | length 153.4
  Top Layer w6: D3.1 1127,948.1 R5.1
NetD4_1: D4.1 R6.1 | length 275.1
  Top Layer w6: R6.1 2258.05,851.85 D4.1
NetD6_1: D6.1 R8.1 | length 215.2
  Top Layer w10: R8.1 2965.06,1408 D6.1
NetD6_2: D6.2 R9.1 | length 129.4
  Top Layer w10: R9.1 2860.15,1503.87 2957.07,1503.87 D6.2
NetD6_3: D6.3 R10.1 | length 149.2
  Top Layer w10: R10.1 2887.19,1621 D6.3
NetD7_1: D7.1 R12.1 | length 115
  Top Layer w6: R12.1 D7.1
NetF1_1: F1.1 J1.1 | length 294.7
  Top Layer w20: J1.1 1286.32,2706.39 1298.61,2718.67 1298.61,2760.61 1347.2,2809.2 F1.1
NetJ2_1: J2.1 P1.4 | length 1005.5
  Top Layer w20: P1.4 2418,2955 2557,2816 2557,2633.09 J2.1
NetP4_2: P4.2 U1.33 | length 324.9
  Top Layer w6: U1.33 1867.48,1530.48 P4.2
NetP10_1: P10.1 P10.2 U4.1 | length 204.2
  Top Layer w10: U4.1 122,847 P10.1 P10.2
NetR3_1: R3.1 U3.6 | length 106.9
  Top Layer w10: U3.6 1603.24,2508.09 R3.1
NetR4_1: R4.1 U3.1 | length 97.5
  Top Layer w10: U3.1 1509,2433.65 R4.1
RST: C11.2 P7.3 R7.1 SW1.1 SW1.2 U1.13 | length 3759.5
  Top Layer w6: P7.3 558,1652 381,1652 264.53,1535.53 264.53,929.38 236,900.86 236,392 280,348 695,348 867.15,520.15 R7.1 1057.8,520.15 SW1.2 ; SW1.1 SW1.2 ; U1.13 1424.02,1175.98 1408,1192 1343,1192 1270,1119 1270,898 1136.85,764.85 C11.2 1136.85,587.17 SW1.2
RX_LED: R5.2 U1.8 | length 236.6
  Top Layer w6: R5.2 1163.85,1236 1199,1236 1273.01,1310.01 U1.8
SCK: P15.3 U1.9 | length 525
  Top Layer w6: P15.3 1029,1160 1088.65,1160 1089.02,1159.63 1160.98,1159.63 1173.46,1172.11 1173.46,1172.46 1279.51,1278.51 U1.9
TX_LED: R6.2 U1.22 | length 382.1
  Top Layer w6: U1.22 1888.2,960 2012.15,960 R6.2
VCC: C5.2 C6.2 C7.2 C8.2 C9.2 C13.2 C14.2 D5.3 P2.2 P2.3 P4.1 P7.2 P7.5 R7.2 U1.14 U1.24 U1.34 U1.44 U4.5 U4.8 | length 134.5
  Bottom Layer w20: v1(2767,434) 2767,401 2802,366 v1(2854,366)
VIN: C3.2 P1.2 P1.3 P2.1 P7.8 R1.2 U2.3 U3.5 | length 3428.2
  Top Layer w20: P7.8 712,1306 712,1821 U2.3 1073,2182 1229,2026 1537,2026 1718,2207 1718,2298.7 1627.28,2389.42 1609.82,2389.42 U3.5 1766,2396 1846,2476 1846,2696 ; P1.3 P1.2 1725,2924 P2.1 1846,2696 ; R1.2 2034.15,2690 1852,2690 1846,2696
VUSB: C10.2 F1.2 P1.1 U1.2 U1.7 | length 2477
  Top Layer w6: v1(1245,1567) 1245,1520 1266.02,1498.98 U1.2 ; F1.2 1497,2947 1630,2814 1630,2730 1736,2624 v1(1736,2477)
  Top Layer w10: U1.7 1393.5,1341.5 1419,1367 1419,1481 1401.02,1498.98 U1.2
  Top Layer w20: C10.2 1224.47,1294 1270.32,1339.85 1316.06,1339.85 U1.7 ; F1.2 1652.2,2958.8 P1.1
  Bottom Layer w6: v1(1245,1567) 1736,2058 v1(1736,2477)
X2: C1.2 R13.1 U1.17 Y1.2 | length 1114.8
  Top Layer w6: U1.17 1550,1053 1593.2,1009.8 1611.85,1009.8 1719,902.65 1719,766.01 Y1.2 1880.71,604.3 2011.3,604.3 ; R13.1 2018,423 1983,458 1983,576 2011.3,604.3 ; C1.2 2011.3,604.3
  Top Layer w10: C1.2@2053.99,612.84 C1.2@2055.15,614
pads on no net: D5.4 J1.4 P7.1 U2.2 U4.2 U4.3 U4.6 U4.7

## Polygon pours and split planes (outlines as drawn)
GND on Bottom Layer "bottom_gnd" (solid, remove dead copper, pour order 4): 5,3030 29,3054 3201,3054 3251,3004 3251,51 3206,6 34,6 5,35
VCC on Top Layer "top_vcc" (solid, remove dead copper, pour order 6): 5,3030 15,3038 35,3054 3232,3054 3251,3035 3251,27 3230,6 30,6 24,14 5,35

## Silkscreen, mask and mechanical layers (free items; w line width, h text height)
Top Overlay:
  drawing of 5 lines, arcs and shapes, not listed
  text "ECEN5013-004 /      Board 2 /  / Aakash Kumar / Arunsundar Kannan" at 49,2561 h50
  text "~3_SCL" at 2238.2,2238 h35
  text "2_SDA" at 2273.19,2138 h35
  text "AREF" at 2308.18,2033 h35
  text "GND" at 2343.17,1928 h35
  text "~13" at 2349,1838 h35
  text "IOREF" at 679,1777 h35
  text "12" at 2383.99,1730 h35
  text "RST" at 679,1684 h35
  text "~11" at 2360.66,1636 h35
  text "3.3V" at 679,1582 h35
  text "~10" at 2349,1539 h35
  text "5V" at 679,1480 h35
  text "~9" at 2378.16,1438 h35
  text "GND" at 679,1385 h35
  text "SKO BUFFS !!!" at 181,1370 h60 r90
  text "SCK" at 849,1362 h30
  text "8" at 2413.15,1338 h35
  text "GND" at 679,1282 h35
  text "7" at 2410,1186 h35
  text "VIN" at 679,1179 h35
  text "MOSI" at 963,1178 h30
  text "~6" at 2375.01,1079 h35
  text "MISO" at 726,1069 h30
  text "A0" at 675,985 h35
  text "~5" at 2375.01,980 h35
  text "A1" at 675,885 h35
  text "4" at 2410,877 h35
  text "A2" at 675,780 h35
  text "~3" at 2375.01,776 h35
  text "A3" at 675,683 h35
  text "2" at 2410,679 h35
  text "TX/1" at 2316.7,586 h35
  text "A4" at 675,578 h35
  text "A5" at 675,475 h35
  text "RX/0" at 2305.03,473 h35
  text "LEONARDO" at 2357,122 h80
  text "GOLDEN  / ARDUINO" at 266,64 h80
Mechanical 15:
  lines w10: 0,1 0,3059 3256,3059 3256,1 0,1
Drill Drawing:
  circle w10: c-798.38,3876.83 r33.33
  lines w10: -831.71,3993.5 -798.38,4010.17 -765.04,3993.5 -781.71,4026.83 -765.04,4060.17 -798.38,4043.5 -831.71,4060.17 -815.04,4026.83 -831.71,3993.5 ; -831.71,4160.17 -815.04,4160.17 -798.38,4143.5 -781.71,4160.17 -765.04,4160.17 -781.71,4176.83 -765.04,4193.5 -781.71,4193.5 -798.38,4210.17 -815.04,4193.5 -831.71,4193.5 -815.04,4176.83 -831.71,4160.17 ; -831.71,4310.17 -815.04,4310.17 -815.04,4293.5 -781.71,4293.5 -781.71,4310.17 -765.04,4310.17 -765.04,4343.5 -781.71,4343.5 -781.71,4360.17 -815.04,4360.17 -815.04,4343.5 -831.71,4343.5 -831.71,4310.17 ; -831.71,4510.17 -765.04,4510.17 -798.38,4443.5 -831.71,4510.17 ; -831.71,4593.5 -765.04,4593.5 -765.04,4660.17 -831.71,4660.17 -831.71,4593.5
  lines w15: -891.5,3798.5 6518.47,3798.5 ; -891.5,4698.5 6518.47,4698.5 ; -340.62,3648.5 -340.62,4848.5 ; 249.22,3648.5 249.22,4848.5 ; 1388.89,3648.5 1388.89,4848.5 ; 1894.76,3648.5 1894.76,4848.5 ; 2628.56,3648.5 2628.56,4848.5 ; 4128.12,3648.5 4128.12,4848.5 ; 4717.96,3648.5 4717.96,4848.5 ; 5463.76,3648.5 5463.76,4848.5 ; -891.5,3648.5 6518.47,3648.5 6518.47,4848.5 -891.5,4848.5 -891.5,3648.5
  text "Symbol" at -801.5,4743.5 h72
  text "Count" at -295.62,4743.5 h72
  text "Hole Size" at 294.22,4743.5 h72
  text "Plated" at 1433.89,4743.5 h72
  text "Hole Type" at 1939.76,4743.5 h72
  text "Drill Layer Pair" at 2673.56,4743.5 h72
  text "Via/Pad" at 4173.12,4743.5 h72
  text "Pad Shape" at 4762.96,4743.5 h72
  text "Template" at 5508.76,4743.5 h72
  text "3" at -295.62,4593.5 h60
  text "39.37mil (1.000mm)" at 294.22,4593.5 h60
  text "PTH" at 1433.89,4593.5 h60
  text "Round" at 1939.76,4593.5 h60
  text "Top Layer - Bottom Layer" at 2673.56,4593.5 h60
  text "Pad" at 4173.12,4593.5 h60
  text "Rounded" at 4762.96,4593.5 h60
  text "r302_151h100r100" at 5508.76,4593.5 h60
  text "4" at -295.62,4443.5 h60
  text "31.50mil (0.800mm)" at 294.22,4443.5 h60
  text "PTH" at 1433.89,4443.5 h60
  text "Round" at 1939.76,4443.5 h60
  text "Top Layer - Bottom Layer" at 2673.56,4443.5 h60
  text "Pad" at 4173.12,4443.5 h60
  text "Rounded" at 4762.96,4443.5 h60
  text "r262_131h80r100" at 5508.76,4443.5 h60
  text "4" at -295.62,4293.5 h60
  text "125.00mil (3.175mm)" at 294.22,4293.5 h60
  text "PTH" at 1433.89,4293.5 h60
  text "Round" at 1939.76,4293.5 h60
  text "Top Layer - Bottom Layer" at 2673.56,4293.5 h60
  text "Pad" at 4173.12,4293.5 h60
  text "Rounded" at 4762.96,4293.5 h60
  text "c152h318" at 5508.76,4293.5 h60
  text "5" at -295.62,4143.5 h60
  text "27.56mil (0.700mm)" at 294.22,4143.5 h60
  text "PTH" at 1433.89,4143.5 h60
  text "Round" at 1939.76,4143.5 h60
  text "Top Layer - Bottom Layer" at 2673.56,4143.5 h60
  text "Pad" at 4173.12,4143.5 h60
  text "Rounded" at 4762.96,4143.5 h60
  text "c121h70" at 5508.76,4143.5 h60
  text "46" at -295.62,3993.5 h60
  text "13.00mil (0.330mm)" at 294.22,3993.5 h60
  text "PTH" at 1433.89,3993.5 h60
  text "Round" at 1939.76,3993.5 h60
  text "Top Layer - Bottom Layer" at 2673.56,3993.5 h60
  text "Via" at 4173.12,3993.5 h60
  text "Rounded" at 4762.96,3993.5 h60
  text "v64h33m0mx0" at 5508.76,3993.5 h60
  text "85" at -295.62,3843.5 h60
  text "35.43mil (0.900mm)" at 294.22,3843.5 h60
  text "PTH" at 1433.89,3843.5 h60
  text "Round" at 1939.76,3843.5 h60
  text "Top Layer - Bottom Layer" at 2673.56,3843.5 h60
  text "Pad" at 4173.12,3843.5 h60
  text "(Mixed)" at 4762.96,3843.5 h60
  text "(Mixed)" at 5508.76,3843.5 h60
  text "147 Total" at -295.62,3693.5 h60

## Dimensions
3256,1 to 3256,3059 on Mechanical 15
0,1 to 3256,1 on Mechanical 15